# Altium PCB PCB KONACNO.PcbDoc (part 2 of 3)
Units mil, origin at the board's own origin, x right, y up, seen from the top; angles counter-clockwise.
Board outline 9378.94 x 3727.36 mil, 6 copper layers (Top Layer, Signal Layer 1, Signal Layer 2, Signal Layer 3, Signal Layer 4, Bottom Layer), stack 58.8 mil thick; 270 components, 238 nets, 1180 pads, 202 vias.
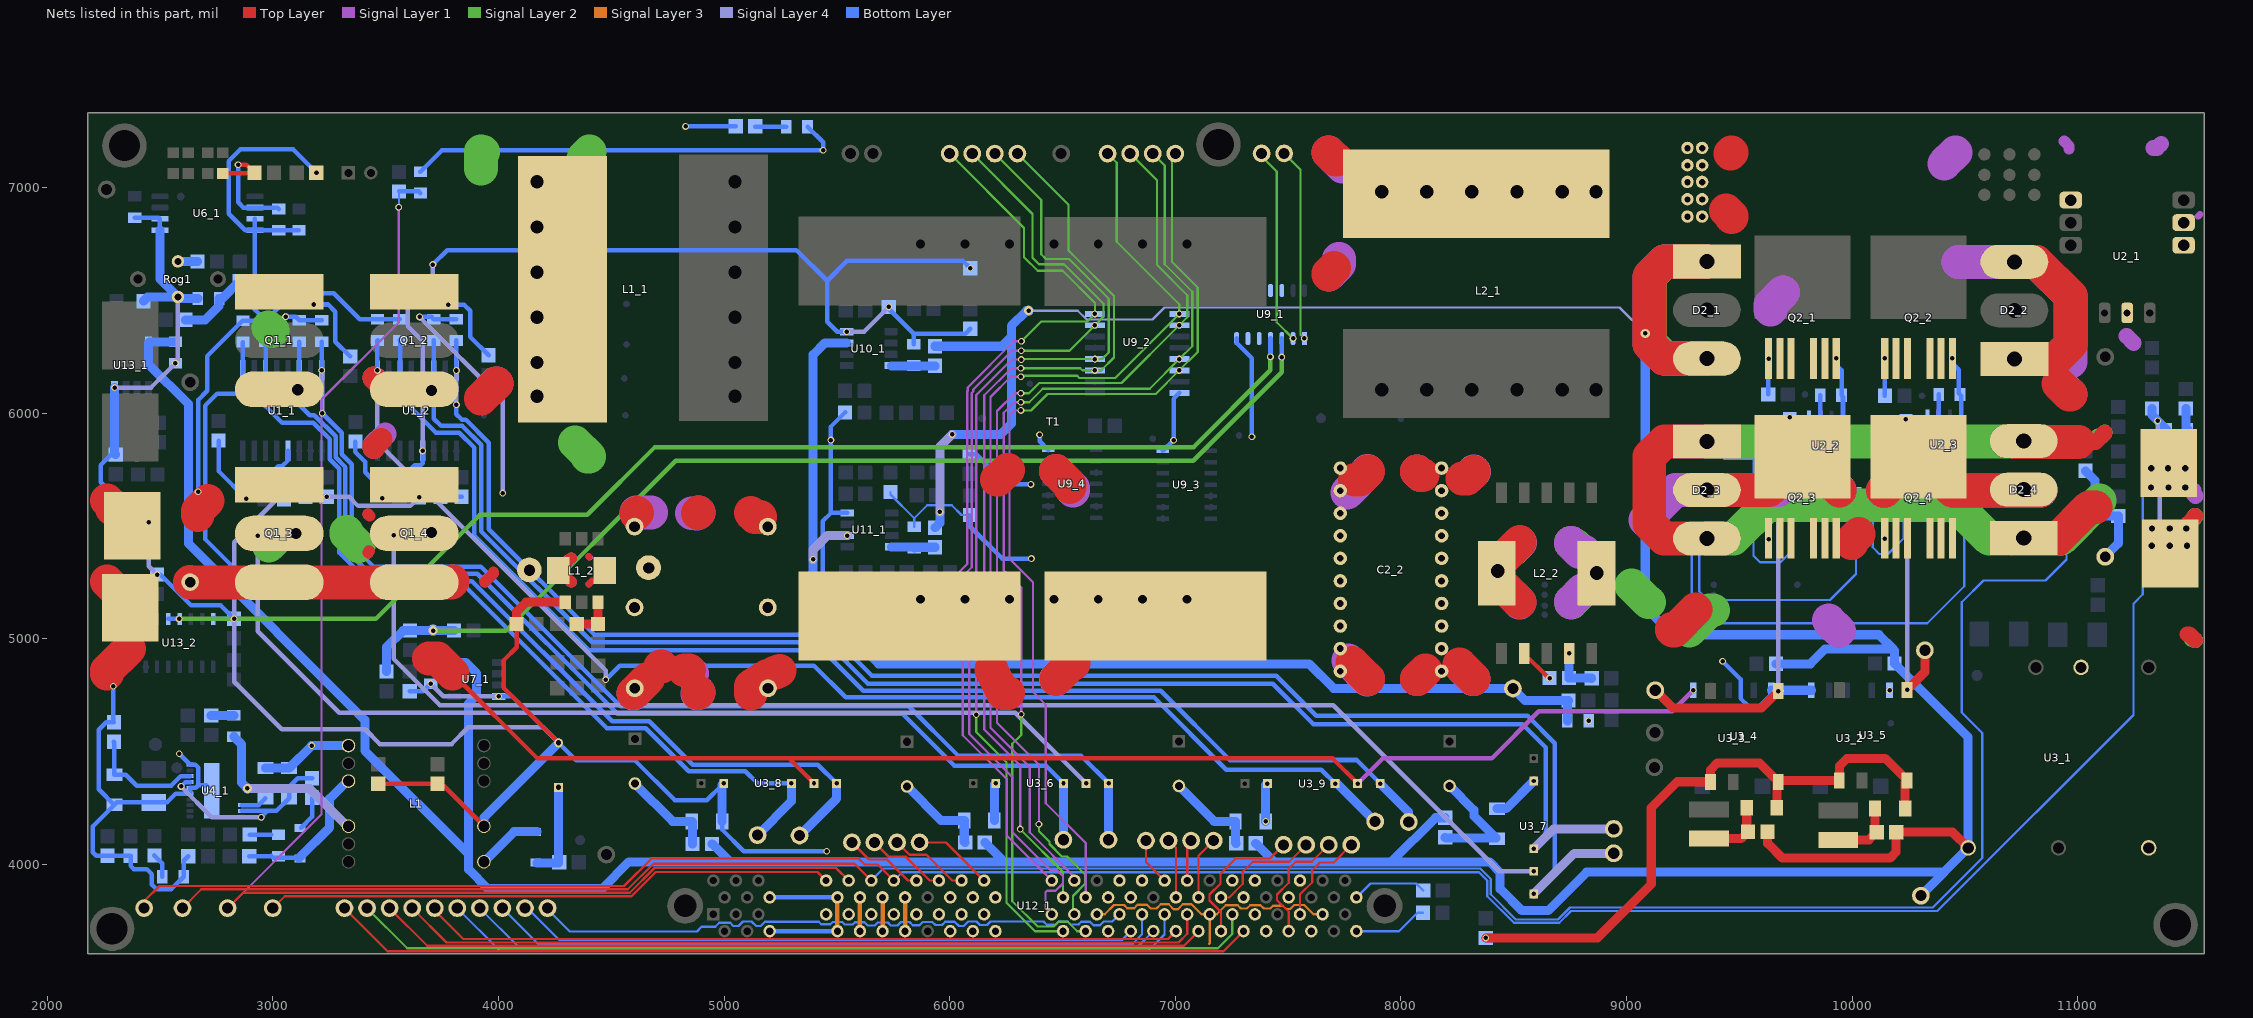
[diagram p6: the nets of this part, all layers, seen from the top]

## Via types
v1: diameter 30, hole 20, Signal Layer 4 to Bottom Layer, 76 vias
v2: diameter 30, hole 20, Top Layer to Bottom Layer, 35 vias
v3: diameter 30, hole 20, Signal Layer 2 to Bottom Layer, 18 vias
v4: diameter 30, hole 20, Signal Layer 1 to Signal Layer 2, 12 vias
v5: diameter 50, hole 28, Top Layer to Bottom Layer, 12 vias
v6: diameter 50, hole 28, Top Layer to Signal Layer 1, 10 vias
v7: diameter 50, hole 28, Top Layer to Signal Layer 2, 9 vias
v8: diameter 40, hole 20, Signal Layer 4 to Bottom Layer, 5 vias
v9: diameter 40, hole 20, Top Layer to Bottom Layer, 5 vias
v10: diameter 30, hole 20, Signal Layer 1 to Bottom Layer, 5 vias
v11: diameter 100, hole 50, Top Layer to Signal Layer 1, 4 vias
v12: diameter 40, hole 20, Signal Layer 2 to Bottom Layer, 3 vias
v13: diameter 40, hole 20, Top Layer to Signal Layer 4, 2 vias
v14: diameter 100, hole 50, Top Layer to Signal Layer 2, 2 vias
v15: diameter 30, hole 20, Signal Layer 3 to Bottom Layer, 1 vias
v16: diameter 120, hole 60, Top Layer to Signal Layer 2, 1 vias
v17: diameter 120, hole 60, Top Layer to Signal Layer 1, 1 vias
v18: diameter 50, hole 28, Signal Layer 1 to Bottom Layer, 1 vias

## Nets (pads, with @x,y where several pads share a name; then routed paths per layer and width w, separated by ;. In a path a pad name is that pad's centre, name@x,y a point inside that pad or via, vN(x,y) a via of type N, cw(c..) or ccw(c..) an arc to the next point about the centre after c; other vN are vias at no path point) (continued)
"+12V NN": C7_1.2 C13_2.2 J44.1 pad.6@5956.69,5562.01 pad.6@6010.83,5905.51 pad.6@6349.41,6453.74 pad.6@9082.68,6353.35 R3_1.2 R3_2.2 R3_3.2 R3_4.2 R3_5.2 R3_6.2 R3_8.1 R3_9.2 R10_12.2 R11_12.2 U3_1.3 U7_1.8 U13_1.8 | length 21363.4
  Top Layer w40: R3_1.2@9625,4144.69 9625,4093.5 9690.94,4027.56 10167.32,4027.56 10194.88,4055.12 R3_2.2@10194.88,4142.72 10444.29,4142.72 U3_1.3@10513.98,4073.03
  Signal Layer 4 w10: v8(6349.41,6453.74) 6567.91,6453.74 6607.28,6414.37 6898.62,6414.37 6951.77,6467.52 8968.5,6467.52 v8(9082.68,6353.35)
  Signal Layer 4 w40: v1(5956.69,5562.01) 5956.69,5851.38 v1(6010.83,5905.51)
  Bottom Layer w40: C13_2.2@2568.9,6315.94 2454.72,6315.94 U13_1.8@2448.82,6310.04 2448.82,6217.52 2626.97,6039.37 2626.97,5421.26 3408.46,4639.76 3408.46,4503.94 3868.11,4044.29 ; C7_1.2@3699.8,4895.67 3803.15,4895.67 U7_1.8@3804.13,4894.69 3855.32,4894.69 3903.54,4846.46 3903.54,4749.02 3868.11,4713.58 3868.11,4044.29 ; R3_5.2@4946.85,4090.55 5026.57,4010.83 ; R11_12.2@5935.04,5492.13 5956.69,5513.78 v1(5956.69,5562.01) ; R10_12.2@5935.04,6296.26 6231.3,6296.26 6273.62,6338.58 ; v1(6010.83,5905.51) 6225.39,5905.51 6273.62,5953.74 6273.62,6338.58 ; R3_3.2@6155.51,4097.44 6242.13,4010.83 ; v8(6349.41,6453.74) 6340.55,6453.74 6273.62,6386.81 6273.62,6338.58 ; R3_6.2@7356.3,4093.5 7431.1,4018.7 7431.1,4010.83 ; R3_4.2@8195.87,4206.69 8153.54,4206.69 7957.68,4010.83 ; v8(9082.68,6353.35) 9082.68,5139.76 9204.72,5017.72 10118.11,5017.72 10181.1,4954.72 ; R3_9.2@9662.4,4888.78 9813.98,4888.78 9879.92,4954.72 10181.1,4954.72 ; J44.1@10304.13,3861.22 10406.5,3963.58 10406.5,3965.55 ; 3868.11,4044.29 3868.11,3978.35 3953.74,3892.72 4460.63,3892.72 4578.74,4010.83 5026.57,4010.83 ; 5026.57,4010.83 6242.13,4010.83 ; 6242.13,4010.83 7431.1,4010.83 ; 7431.1,4010.83 7957.68,4010.83 ; 7957.68,4010.83 8392.72,4010.83 8439.96,3963.58 8439.96,3891.73 8536.42,3795.28 8652.56,3795.28 8822.83,3965.55 10406.5,3965.55 ; 10181.1,4954.72 10187.01,4948.82 R3_8.1@10187.01,4890.75 10513.98,4563.78 U3_1.3@10513.98,4073.03 10406.5,3965.55
"+15V Q21/Q23": C2_3.2 J32.1 pad.6@9722.44,5981.3 pad.12@9672.05,4767.72 U2_2.1 U3_4.5 | length 1950.6
  Top Layer w40: J32.1@9126.97,4771.65 9205.71,4692.91 9597.24,4692.91 v13(9672.05,4767.72)
  Signal Layer 4 w20: v13(9672.05,4767.72) 9672.05,5957.48 9695.87,5981.3 v1(9722.44,5981.3)
  Bottom Layer w20: v1(9722.44,5981.3) 9796.26,5981.3 U2_2.1@9809.06,5968.5
"+15V Q22/Q24": C2_7.2 J33.1 pad.6@10238.19,5973.43 pad.12@10242.91,4773.62 U2_3.1 U3_5.5 | length 1504.3
  Top Layer w40: v13(10242.91,4773.62) 10321.85,4852.56 J33.1@10321.85,4948.82
  Signal Layer 4 w20: v1(10238.19,5973.43) 10242.91,5968.7 v13(10242.91,4773.62)
  Bottom Layer w20: v1(10238.19,5973.43) 10332.76,5973.43 U2_3.1@10332.83,5973.35
"+20V Q11": C1_6.2 J34.1 pad.6@3217.6,6189.55 pad.6@3219.49,5999.02 U1_1.16 U3_6.7 | length 4997.8
  Signal Layer 4 w20: v1(3217.52,6189.63) 3219.49,6187.66 v1(3219.49,5999.02)
  Bottom Layer w20: C1_6.2@3217.52,6316.93 v1(3217.52,6189.63) U1_1.16@3217.6,6189.55 ; v1(3219.49,5999.02) 3306.1,5912.4 3306.1,5816.93 3350.39,5772.64 3350.39,5416.34 3446.85,5319.88 3922.24,5319.88 4541.34,4700.79 5818.9,4700.79 6039.37,4480.31 6583.27,4480.31 U3_6.7@6704.33,4359.25
  Bottom Layer w40: J34.1@6703.74,4109.25 6703.74,4358.66 U3_6.7@6704.33,4359.25
"+20V Q12": C1_11.2 J36.1 pad.6@3813.98,6037.4 pad.6@3813.98,6188.68 U1_2.16 U3_7.7 | length 7159.4
  Signal Layer 4 w20: v1(3813.98,6037.4) pad.6@3813.98,6188.68 v1(3814.06,6188.76)
  Signal Layer 4 w40: U3_7.7@8588.58,3869.49 8768.31,4049.21 J36.1@8942.91,4049.21
  Bottom Layer w20: C1_11.2@3812.99,6321.85 3814.06,6320.79 v1(3814.06,6188.76) ; v1(3813.98,6037.4) 3813.98,5995.08 3837.6,5971.46 3855.32,5971.46 3957.68,5869.09 3957.68,5485.24 4424.21,5018.7 5472.44,5018.7 5655.51,4835.63 7446.85,4835.63 7624.02,4658.46 8561.02,4658.46 8682.09,4537.4 8682.09,3962.99 U3_7.7@8588.58,3869.49
"+20V Q13": C1_8.2 J38.1 U1_1.11 U3_8.7 | length 4077.6
  Bottom Layer w20: C1_8.2@2968.5,6315.94 2968.5,6190.45 U1_1.11@2967.6,6189.55 2967.6,6031.42 3041.34,5957.68 3179.13,5957.68 3251.97,5884.84 3251.97,5795.28 3294.29,5752.95 3294.29,5381.89 3421.26,5254.92 3882.87,5254.92 4503.94,4633.86 4669.29,4633.86 4861.22,4441.93 5415.94,4441.93 U3_8.7@5498.62,4359.25
  Bottom Layer w40: J38.1@5334.65,4127.95 5498.62,4291.93 U3_8.7@5498.62,4359.25
"+20V Q14": C1_13.2 J40.1 U1_2.11 U3_9.7 | length 5754.7
  Bottom Layer w20: C1_13.2@3562.99,6321.85 3564.06,6320.79 U1_2.11@3564.06,6188.76 3564.06,6072.76 3723.43,5913.39 3826.77,5913.39 3892.72,5847.44 3892.72,5457.68 4401.57,4948.82 5437.99,4948.82 5617.13,4769.69 6935.04,4769.69 7242.13,4462.6 7803.74,4462.6 U3_9.7@7908.07,4358.27
  Bottom Layer w40: U3_9.7@7908.07,4358.27 8034.45,4231.89 J40.1@8034.45,4187.99
+ROG: R13_12.1 Rog1.1 | length 87
  Bottom Layer w40: Rog1.1@2579.72,6672.24 2665.35,6672.24 R13_12.1@2666.34,6671.26
"-5V Q11": C1_7.1 J35.1 U1_1.14 U3_6.5 | length 4879.5
  Bottom Layer w20: C1_7.1@3118.11,6316.93 3118.11,6190.06 U1_1.14@3117.6,6189.55 3117.6,6036.93 3163.39,5991.14 3184.06,5991.14 3278.54,5896.65 3278.54,5804.13 3321.85,5760.83 3321.85,5396.65 3430.12,5288.39 3906.5,5288.39 4526.57,4668.31 5789.37,4668.31 6019.69,4437.99 6425.59,4437.99 U3_6.5@6504.33,4359.25
  Bottom Layer w40: J35.1@6503.94,4109.25 6503.94,4358.86 U3_6.5@6504.33,4359.25
"-5V Q12": C1_12.1 J37.1 U1_2.14 U3_7.5 | length 6963.5
  Signal Layer 4 w40: U3_7.5@8588.58,4069.49 8676.57,4157.48 J37.1@8942.91,4157.48
  Bottom Layer w20: C1_12.1@3713.58,6321.85 3714.06,6321.38 U1_2.14@3714.06,6188.76 3714.06,5974.92 3746.06,5942.91 3840.55,5942.91 3924.21,5859.25 3924.21,5475.39 4415.35,4984.25 5454.72,4984.25 5637.8,4801.18 7432.09,4801.18 7611.22,4622.05 8537.4,4622.05 8640.75,4518.7 8640.75,4121.65 U3_7.5@8588.58,4069.49
"-5V Q13": C1_9.1 J39.1 U1_1.9 U3_8.5 | length 4335.7
  Bottom Layer w20: C1_9.1@2868.11,6314.96 2868.11,6190.06 U1_1.9@2867.6,6189.55 2867.6,6107.76 2846.46,6086.61 2753.94,6086.61 2699.8,6032.48 2699.8,5441.93 2918.31,5223.43 3861.22,5223.43 4481.3,4603.35 4653.54,4603.35 4843.5,4413.39 5094.49,4413.39 5148.62,4359.25 U3_8.5@5298.62,4359.25
  Bottom Layer w40: J39.1@5148.62,4129.92 5298.62,4279.92 U3_8.5@5298.62,4359.25
"-5V Q14": C1_14.1 J41.1 pad.6@3463.98,6188.84 pad.6@3464.06,6188.76 pad.6@4475.39,4820.87 U1_2.9 U3_9.5 | length 5644.5
  Signal Layer 4 w20: v1(3463.98,6188.84) 3463.98,5870.67 4475.39,4859.25 v1(4475.39,4818.9)
  Bottom Layer w20: U1_2.9@3464.06,6188.76 3464.06,6321.34 C1_14.1@3464.57,6321.85 ; v1(4475.39,4818.9) 4537.4,4880.91 5398.62,4880.91 5539.37,4740.16 6905.51,4740.16 7226.38,4419.29 7647.05,4419.29 U3_9.5@7708.07,4358.27
  Bottom Layer w40: U3_9.5@7708.07,4358.27 7717.52,4358.27 J41.1@7885.83,4189.96
/FAULT3: U9_1.5
/FAULT4: U9_1.6
/FAULT5: U9_1.12
/FAULT6: U9_1.11
/OVERCURRENT: pad.6@3710.63,5038.39 pad.6@7471.46,6248.03 R7_7.1 R7_8.2 R7_10.1 U9_1.3 | length 4822.8
  Signal Layer 2 w20: v12(3710.63,5036.42) 4033.46,5036.42 4785.43,5788.39 7078.74,5788.39 7471.46,6181.1 v3(7471.46,6248.03)
  Bottom Layer w20: v3(7471.46,6248.03) 7471.85,6248.43 U9_1.3@7471.85,6330.71
  Bottom Layer w40: R7_10.1@3503.94,4854.33 3503.94,4962.6 3577.76,5036.42 R7_8.2@3608.27,5036.42 v12(3710.63,5036.42) R7_7.1@3803.15,5036.42
/VNSHORTCIRCUIT: pad.6@7421.46,6249.02 pad.7@2584.65,5087.6 U9_1.4 U13_2.3 U13_2.4 | length 5484.8
  Signal Layer 2 w20: v3(2584.65,5087.6) 3456.69,5087.6 3918.31,5549.21 4393.7,5549.21 4693.9,5849.41 7081.69,5849.41 7421.46,6189.17 v3(7421.46,6249.02)
  Bottom Layer w20: U13_2.3@2537.01,5087.6 v3(2584.65,5087.6) U13_2.4@2587.01,5087.6 ; U9_1.4@7421.85,6330.71 7421.85,6249.41 pad.6@7422.24,6249.02
ADC-A0: JA0.1 U12_1.57 | length 2534.8
  Top Layer w10: JA0.1@3000,3806.1 3053.15,3859.25 4589.57,3859.25 4696.85,3966.54 5414.4,3966.54 U12_1.57@5452.51,3928.42
ADC-A1: C6_4.2 JA1.1 pad.6@3558.07,6912.4 R6_7.2 U12_1.59 | length 6437.8
  Top Layer w10: JA1.1@2800,3806.1 2867.91,3874.02 4581.69,3874.02 4691.93,3984.25 5496.68,3984.25 U12_1.59@5552.51,3928.42
  Signal Layer 1 w10: JA1.1@2800,3806.1 3216.54,4222.64 3216.54,6060.04 3558.07,6401.57 v10(3558.07,6912.4)
  Bottom Layer w10: v10(3558.07,6912.4) 3560.04,6914.37 R6_7.2@3560.04,6982.28
  Bottom Layer w20: R6_7.2@3560.04,6982.28 3647.64,6982.28 C6_4.2@3654.53,6975.39
ADC-A2: C5_1.2 JA2.1 R5_4.2 U12_1.61 | length 10567.1
  Top Layer w10: JA2.1@2600,3806.1 2683.66,3889.76 4573.82,3889.76 4687.01,4002.95 5577.98,4002.95 U12_1.61@5652.51,3928.42
  Bottom Layer w10: U12_1.61@5652.51,3928.42 5705.39,3981.3 8351.38,3981.3 8397.64,3935.04 8397.64,3867.13 8508.86,3755.91 8695.87,3755.91 8749.02,3809.06 10356.3,3809.06 10575.79,4028.54 10575.79,4582.68 10485.24,4673.23 10485.24,5161.42 10581.69,5257.87 10856.3,5257.87 10949.8,5351.38 10949.8,5569.88 11018.7,5638.78 C5_1.2@11076.77,5638.78
  Bottom Layer w40: R5_4.2@11033.46,5744.09 11076.77,5700.79 C5_1.2@11076.77,5638.78
ADC-A3: C2_11.2 JA3.1 R2_11.2 U12_1.63 | length 11022.9
  Top Layer w10: JA3.1@2429.92,3806.1 2429.92,3836.02 2498.43,3904.53 4557.09,3904.53 4679.13,4026.57 5596.46,4026.57 5623.61,3999.42 5681.51,3999.42 U12_1.63@5752.51,3928.42
  Bottom Layer w10: U12_1.63@5752.51,3928.42 5789.64,3965.55 8345.47,3965.55 8382.87,3928.15 8382.87,3859.25 8500.98,3741.14 8701.77,3741.14 8753.94,3793.31 10376.97,3793.31 11246.06,4662.4 11246.06,5155.51 11287.4,5196.85 11287.4,5838.58 11325.79,5876.97 11437.01,5876.97 C2_11.2@11487.2,5927.17
  Bottom Layer w40: R2_11.2@11478.35,6020.67 11478.35,5936.02 C2_11.2@11487.2,5927.17
ADC-A4: JA4.1 U12_1.65 | length 355.8
  Top Layer w10: JA4.1@5566.73,4097.44 5642.52,4021.65 5722.44,4021.65 5815.67,3928.42 U12_1.65@5852.51,3928.42
ADC-A5: JA5.1 U12_1.67 | length 355.8
  Top Layer w10: JA5.1@5666.73,4097.44 5728.74,4035.43 5804.13,4035.43 5911.15,3928.42 U12_1.67@5952.51,3928.42
ADC-A6: JA6.1 U12_1.69 | length 355.8
  Top Layer w10: JA6.1@5766.73,4097.44 5821.85,4042.32 5897.2,4042.32 6011.1,3928.42 U12_1.69@6052.51,3928.42
ADC-A7: JA7.1 U12_1.71 | length 355.8
  Top Layer w10: JA7.1@5866.73,4097.44 5983.49,4097.44 U12_1.71@6152.51,3928.42
ADC-B0: U12_1.7
ADC-B1: U12_1.9
ADC-B2: U12_1.11
ADC-B3: U12_1.13
ADC-B4: U12_1.15
ADC-B5: U12_1.17
ADC-B6: U12_1.19
ADC-B7: U12_1.21
DRAINQ13: C1_6.1 C1_7.2 L1_1.1 pad.4@4283.46,6549.21 pad.6@3057.09,6427.17 pad.6@3110.24,6103.35 pad.15@3102.36,5467.52 Q1_1.S Q1_3.D U3_6.6 | length 4996.1
  Signal Layer 2 w150: 2980.32,6378.94 2993.11,6366.14 3000,6366.14 ; 2982.28,5413.39 3011.81,5442.91 3011.81,5450.79 ; 3326.77,5472.44 3326.77,5464.57 3379.92,5411.42 ; 3923.23,7082.68 3923.23,7159.45 3931.1,7156.5 ; 4339.57,5870.08 4402.56,5807.09 4395.67,5807.09 ; 4353.35,7055.12 4378.94,7134.84 4403.54,7159.45
  Signal Layer 4 w20: v2(2934.06,5455.71) 2934.06,5033.46 3295.28,4672.24 6291.34,4672.24 U3_6.6@6604.33,4359.25
  Bottom Layer w20: v3(3057.09,6427.17) 3102.36,6427.17 C1_7.2@3118.11,6411.42 C1_6.1@3217.52,6411.42
  other v14: 3103.35,5466.54 3110.24,6103.35
DRAINQ14: C1_11.1 C1_12.2 L1_2.7 pad.6@3650.59,6426.18 pad.6@3703.74,6100.39 pad.15@3702.76,5471.46 pad.15@4136.81,5305.12 Q1_2.S Q1_4.D U3_7.6 | length 8014.1
  Top Layer w50: 3422.24,5380.91 3422.24,5383.86 3427.17,5388.78 ; 3422.24,5551.18 3429.13,5544.29 3431.1,5544.29 ; 3940.94,5250.98 3940.94,5251.97 3978.35,5289.37 3978.35,5294.29 ; 4323.82,5250.98 4272.64,5302.17 L1_2.7@4266.14,5302.17 4321.26,5357.28 4323.82,5357.28
  Top Layer w100: 3447.83,5846.46 3447.83,5852.36 3480.32,5884.84 ; 3447.83,6156.5 3499.02,6105.31 Q1_2.S@3626.97,6105.31 ; Q1_4.D@3488.19,5485.24 3528.54,5485.24 3547.24,5466.54 Q1_4.D@3626.97,5466.54
  Top Layer w150: 3923.23,6063.98 3991.14,6131.89
  Signal Layer 1 w50: 3422.24,5380.91 3422.24,5381.89 3424.21,5383.86 3424.21,5387.8 ; 3422.24,5551.18 3423.23,5550.2 3424.21,5550.2 ; 3940.94,5250.98 3940.94,5254.92 3949.8,5263.78 ; 4309.06,5349.41 4315.94,5349.41 4323.82,5357.28 ; 4318.9,5254.92 4322.83,5250.98 4323.82,5250.98
  Signal Layer 1 w100: 3447.83,5846.46 3447.83,5857.28 3498.03,5907.48 ; 3447.83,6156.5 3452.76,6151.57 3457.68,6151.57
  Signal Layer 1 w150: 3960.63,6102.36 3990.16,6131.89 3992.13,6131.89
  Signal Layer 4 w20: v2(3536.42,5459.65) 3536.42,4910.43 3741.14,4705.71 7699.8,4705.71 8436.02,3969.49 U3_7.6@8588.58,3969.49 ; v1(3650.59,6426.18) 4019.68,6057.09 v2(4019.68,5645.67)
  Bottom Layer w20: v1(3650.59,6426.18) 3703.74,6426.18 C1_12.2@3713.58,6416.34 C1_11.1@3812.99,6416.34
  other v11: 4137.8,5304.13 3703.74,5470.47 3703.74,6100.39
DRAINQ23: C2_4.1 D2_1.A1 D2_1.A2 D2_3.K L2_2.11 pad.13@8867.13,5291.34 Q2_1.2 Q2_1.3 Q2_1.5 Q2_1.6 Q2_1.7 Q2_3.8 U2_2.4 | length 4762.4
  Top Layer w150: D2_3.K@9355.91,5658.94 9632.17,5658.94 Q2_3.8@9779.09,5805.87 9794.53,5805.87 Q2_3.8@9942.91,5657.48 ; D2_1.A2@9355.91,6241.22 9166.26,6241.22 9101.38,6306.1 9101.38,6605.31 9167.2,6671.14 D2_1.A1@9355.91,6671.14
  Signal Layer 1 w150: 8752.95,5424.21 8792.32,5384.84 8813.98,5384.84 ; 8753.94,5161.42 8753.94,5163.39 8805.12,5214.57 ; 9083.66,5526.57 9216.02,5658.94 D2_3.K@9355.91,5658.94 9669.8,5658.94 9670.28,5658.46 ; D2_1.A1@9355.91,6671.14 9169.17,6671.14 9100.39,6602.36 9100.39,6306.1 9165.28,6241.22 D2_1.A2@9355.91,6241.22 D2_1.A2@9427.17,6241.22 ; 9895.67,5081.69 9941.93,5035.43 ; 9910.43,5691.93 9943.9,5658.46
  Signal Layer 2 w150: 8752.95,5162.4 8754.92,5160.43 8754.92,5163.39 8802.17,5210.63 ; 8753.94,5424.21 8767.72,5410.43 8775.59,5410.43 ; 9021.65,5236.22 9096.46,5161.42 9099.41,5161.42 ; D2_1.A2@9355.91,6241.22 9175.12,6241.22 9103.35,6312.99 9103.35,6607.28 9167.2,6671.14 D2_1.A1@9355.91,6671.14
  Bottom Layer w20: v2(9928.15,6242.13) 9928.15,6215.55 9952.76,6190.94 C2_4.1@9952.76,6078.74 9959.06,6072.44 U2_2.4@9959.06,5968.5
  other v16: 8867.13,5291.34
DRAINQ24: C2_8.1 D2_2.A1 D2_2.A2 D2_4.K L2_1.2 pad.4@8332.68,6972.44 pad.6@9269.69,6871.06 pad.6@9269.69,6947.83 pad.6@9269.69,7024.61 pad.6@9269.69,7098.43 pad.6@9269.69,7175.2 pad.6@9334.65,6871.06 pad.6@9334.65,6947.83 pad.6@9334.65,7024.61 pad.6@9334.65,7098.43 pad.6@9334.65,7175.2 Q2_2.2 Q2_2.3 Q2_2.5 Q2_2.6 Q2_2.7 Q2_4.8 U2_3.4 | length 3775.5
  Top Layer w150: 7679.13,6614.17 7679.13,6619.09 7703.74,6643.7 ; 7679.13,7155.51 7710.63,7124.02 7713.58,7124.02 ; 9440.94,6897.64 9464.57,6874.02 9464.57,6868.11 ; 9460.14,7151.08 9464.57,7155.51 ; Q2_4.8@10136.81,5656.5 10144.72,5656.5 Q2_4.8@10294.09,5805.87 10442.95,5657.01 D2_4.K@10833.66,5657.01 ; D2_2.A1@10718.9,6240.28 10902.68,6240.28 10969.49,6307.09 10969.49,6517.72 10817.01,6670.2 D2_2.A2@10718.9,6670.2 ; 10914.37,6129.92 10961.61,6082.68 10968.5,6082.68
  Signal Layer 1 w150: 7679.13,7155.51 7741.14,7093.5 ; 7680.12,6614.17 7725.39,6659.45 7725.39,6683.07 ; 9637.8,6458.66 9637.8,6479.33 9693.9,6535.43 ; 10135.79,5657.48 10143.7,5657.48 ; 10407.48,7105.31 10457.68,7155.51 ; 10448.86,5657.48 D2_4.K@10835.63,5657.48 ; 10470.47,6670.2 D2_2.A2@10718.9,6670.2 10815.04,6670.2 10966.54,6518.7 10966.54,6227.36 ; 10919.29,6128.94 10964.57,6083.66 10968.5,6083.66
  Bottom Layer w20: v2(10443.9,6244.09) 10443.9,6220.47 10472.44,6191.93 10472.44,6087.6 C2_8.1@10477.36,6082.68 10482.83,6077.2 U2_3.4@10482.83,5973.35
  other v6: 9269.69,6870.08 9334.65,6870.08 9269.69,6946.85 9334.65,6946.85 9269.69,7023.62 9334.65,7023.62 9269.69,7097.44 9334.65,7097.44 9269.69,7174.21 9334.65,7174.21
"DSP EN": J6.1 pad.6@7571.85,6330.71 U9_1.1 | length 857.3
  Signal Layer 2 w10: J6.1@7482.36,7150.98 7555.12,7078.23 7555.12,6347.44 v3(7571.85,6330.71)
EMU0: R12_3.2 U12_1.100 | length 334.5
  Bottom Layer w10: U12_1.100@7802.51,3853.62 7803.42,3853.62 7865.16,3915.35 8066.93,3915.35 R12_3.2@8098.43,3883.86
EMU1: R12_1.2 U12_1.50 | length 328.7
  Bottom Layer w10: U12_1.50@7802.51,3704.01 7991.41,3704.01 8072.83,3785.43 R12_1.2@8097.44,3785.43
GATEQ11: Q1_1.G R1_1.2 | length 335.6
  Bottom Layer w20: v2(3181.1,6481.3) 3246.06,6481.3 3277.56,6449.8 3277.56,6316.93 R1_1.2@3343.5,6250.98
GATEQ12: Q1_2.G R1_6.2 | length 338.7
  Bottom Layer w20: v2(3778.54,6479.33) 3849.41,6479.33 3875,6453.74 3875,6337.6 R1_6.2@3956.69,6255.91
GATEQ13: Q1_3.G R1_2.2 | length 307.4
  Bottom Layer w20: R1_2.2@2759.84,5877.95 2759.84,5743.11 v2(2881.89,5621.06)
GATEQ14: Q1_4.G R1_7.2 | length 300.3
  Bottom Layer w20: R1_7.2@3366.14,5874.02 3366.14,5827.76 3410.43,5783.46 3410.43,5737.2 3485.24,5662.4 v2(3485.24,5623.03)
GATEQ21: Q2_1.1 R2_1.2 | length 156.5
  Bottom Layer w20: R2_1.2@9627.95,6082.68 v2@9627.95,6239.17
  other v2: 9628.94,6240.16
GATEQ22: Q2_2.1 R2_3.2 | length 167.3
  Bottom Layer w20: R2_3.2@10144.69,6076.77 v2(10144.69,6244.09)
GATEQ23: Q2_3.1 R2_2.2 | length 298.2
  Bottom Layer w20: v2(9628.94,5441.93) R2_2.2@9628.94,5740.16
GATEQ24: Q2_4.1 R2_4.2 | length 303.1
  Bottom Layer w20: v2(10144.69,5443.9) R2_4.2@10144.69,5747.05
GND_HV: C1_1.2 C1_8.1 C1_9.2 C1_13.1 C1_14.2 C4_1.2 C4_2.2 C4_3.1 C4_4.2 C4_6.1 C6_2.1 C6_3.1 L1.6 pad.2@2368.11,5136.81 pad.2@2377.95,5500.98 pad.12@9295.28,4771.65 Q1_3.S Q1_4.S R4_2.1 R4_3.1 R4_4.1 R4_8.1 R6_6.1 RGND.2 U3_3.5 U3_8.6 U3_9.6 U4_1.15 U4_1.16 U4_1.20 U4_1.21 U6_1.3 U6_1.4 | length 13619.8
  Top Layer w20: 3797.24,4845.47 4173.23,4469.49 5288.39,4469.49 ; U3_8.6@5398.62,4359.25 5288.39,4469.49 ; U3_9.6@7808.07,4358.27 7696.85,4469.49 5288.39,4469.49
  Top Layer w150: 2265.75,4846.46 2265.75,4859.25 2362.2,4955.71 ; pad.2@2265.75,5253.94 2318.9,5200.79 pad.2@2322.83,5200.79 ; pad.2@2265.75,5612.2 2286.42,5591.54 pad.2@2286.42,5576.77 ; C1_1.2@2633.86,5250.98 2634.84,5250 Q1_3.S@3028.54,5250 Q1_4.S@3626.97,5250 3792.32,5250 Q1_4.S@3797.24,5254.92 ; 2667.32,5547.24 2667.32,5566.93 2711.61,5611.22 ; 3692.91,4912.4 3730.31,4912.4 3797.24,4845.47
  Signal Layer 1 w20: U3_9.6@7808.07,4358.27 7919.29,4469.49 8402.56,4469.49 8611.22,4678.15 9201.77,4678.15 v10(9295.28,4771.65)
  Bottom Layer w20: v2(2293.31,4789.37) 2293.31,4632.87 R4_4.1@2296.26,4629.92 2261.81,4629.92 2228.94,4597.05 2228.94,4332.68 C4_4.2@2298.23,4263.39 ; v2@2583.66,4490.16 v2(2585.67,4490.16) U4_1.20@2634.02,4441.81 2657.6,4441.81 2670.28,4429.13 2670.28,4351.38 ; R4_8.1@2625.98,4036.42 2605.31,4015.75 C4_3.1@2605.31,3945.87 2550.2,3890.75 2484.25,3890.75 2464.57,3910.43 2464.57,3956.69 2441.93,3979.33 2383.86,3979.33 2370.08,3993.11 R4_2.1@2370.08,4038.39 R4_3.1@2267.72,4038.39 2217.52,4038.39 2202.76,4053.15 2202.76,4167.91 C4_4.2@2298.23,4263.39 ; v2(2669.29,5651.57) 2669.29,6058.07 2709.65,6098.43 2709.65,6252.95 2866.14,6409.45 C1_9.2@2868.11,6409.45 2967.52,6409.45 C1_8.1@2968.5,6410.43 ; U4_1.21@2729.49,4326.26 2704.37,4351.38 2670.28,4351.38 ; U6_1.3@2921.26,6860.83 U6_1.4@2921.26,6810.83 ; C6_3.1@3116.14,6810.04 C6_2.1@3026.57,6810.04 3025.79,6810.83 U6_1.4@2921.26,6810.83 ; v2(3193.9,7064.96) 3090.55,7168.31 2856.3,7168.31 2805.12,7117.13 2805.12,6883.86 2878.15,6810.83 U6_1.4@2921.26,6810.83 ; C1_13.1@3562.99,6416.34 C1_14.2@3464.57,6416.34 3384.84,6416.34 3269.68,6531.5 3089.57,6531.5 C1_8.1@2968.5,6410.43 ; v2(4829.72,7270.67) 4830.71,7271.65 RGND.2@5052.17,7271.65 ; C4_4.2@2298.23,4263.39 2309.45,4274.61 C4_6.1@2472.44,4274.61 2531.5,4274.61 2570.75,4313.86 U4_1.15@2634.02,4313.86 U4_1.16@2634.02,4339.45 2658.35,4339.45 2670.28,4351.38 ; U6_1.4@2921.26,6810.83 2921.26,6457.68 C1_8.1@2968.5,6410.43
  Bottom Layer w40: C4_2.2@2967.52,4427.17 C4_1.2@3072.83,4427.17 v2(3172.44,4526.77) L1.6@3329.72,4526.77
GND_LV: C1_5.1 C1_10.1 C2_1.2 C2_3.1 C2_5.1 C2_6.1 C2_7.1 C2_9.1 C2_10.1 C2_11.1 C3_4.2 C3_5.2 C3_6.1 C3_7.1 C3_8.1 C3_9.1 C4_7.2 C5_1.1 C6_1.1 C6_4.1 C7_1.1 C8_1.2 C10_1.1 C11_1.1 C13_1.2 C13_2.1 CGND.1 D2_3.A1 D2_3.A2 D2_4.A1 D2_4.A2 L1.10 L1_2.3 L2_2.4 OC.1 pad.2@11408.46,5377.95 pad.6@2298.82,6113.19 pad.6@2449.8,5516.73 pad.6@2568.9,6221.46 pad.6@3239.17,5628.94 pad.6@3648.62,5626.48 pad.6@3648.62,5626.97 pad.6@3664.06,5832.26 pad.6@3699.8,4803.15 pad.6@3709.65,6658.46 pad.6@4000.98,4746.65 pad.6@5543.31,6360.63 pad.6@5730.31,6470.47 pad.6@6091.54,6641.73 pad.6@11353.35,5965.55 pad.7@2487.2,5284.45 pad.7@2828.74,5088.58 Q2_3.2 Q2_3.3 Q2_3.5 Q2_3.6 Q2_3.7 Q2_4.2 Q2_4.3 Q2_4.5 Q2_4.6 Q2_4.7 R1_3.1 R1_4.1 R1_5.1 R1_8.1 R1_9.1 R1_10.1 R2_5.1 R2_6.1 R2_7.1 R2_8.1 R2_10.1 R5_3.1 R7_6.1 R7_9.1 R8_4.1 R10_3.1 R10_4.1 R10_9.1 R10_11.1 R11_3.1 R11_4.1 R11_9.1 R11_11.1 R12_2.1 R13_5.1 R13_8.1 R13_9.1 R13_10.1 Rog1.2 SC_ROG.1 U1_1.4 U1_2.4 U2_1.8 U2_2.7 U2_3.7 U3_1.2 U3_1.5 U3_2.1 U3_2.5 U3_3.1 U3_4.1 U3_4.4 U3_5.1 U3_5.4 U3_6.2 U3_7.2 U3_8.2 U3_9.2 U6_1.5 U6_1.6 U7_1.4 U9_1.7 U9_2.10 U9_3.7 U9_4.7 U10_1.4 U11_1.4 U12_1.6 U12_1.8 U12_1.10 U12_1.12 U12_1.14 U12_1.27 U12_1.37 U12_1.47 U12_1.56 U12_1.58 U12_1.60 U12_1.62 U12_1.64 U13_1.4 U13_2.7 | length 40431.3
  Top Layer w20: SC_ROG.1@3467.52,4357.28 OC.1@3730.31,4357.28 3748.82,4357.28 L1.10@3936.81,4169.29 ; R7_6.1@4080.71,5065.94 4080.71,4961.61 4024.61,4905.51 4024.61,4780.51 C4_7.2@4266.73,4538.39 ; L2_2.4@8545.47,4934.84 8654.53,4825.79 v2(8658.46,4825.79)
  Top Layer w40: R7_6.1@4080.71,5065.94 4080.71,5120.08 4122.8,5162.17 L1_2.3@4296.26,5162.17 ; v2(8375.98,3674.21) 8871.06,3674.21 9109.25,3912.4 9109.25,4250 9225.39,4366.14 U3_4.1@9372.05,4366.14 9372.05,4419.29 9402.56,4449.8 9588.39,4449.8 U3_4.4@9672.05,4366.14 ; C3_4.2@9666.34,4250.98 9666.34,4360.43 U3_4.4@9672.05,4366.14 ; C3_5.2@10234.65,4247.09 10234.65,4363.78 U3_5.4@10242.91,4372.05 10145.47,4469.49 9977.36,4469.49 9942.91,4435.04 U3_5.1@9942.91,4372.05 9677.95,4372.05 U3_4.4@9672.05,4366.14
  Top Layer w70: 11002.95,5871.97 11078.66,5871.97 11119.09,5912.4 ; 11486.22,5019.69 11493.11,5019.69 11519.68,4993.11 ; pad.2@11488.19,5510.83 11519.68,5542.32 11519.68,5544.29
  Top Layer w150: 9200.79,5044.29 9200.79,5039.37 9204.72,5035.43 9211.61,5035.43 9305.12,5128.94 ; D2_3.A2@9355.91,5443.98 9166.26,5443.98 9100.39,5509.84 9100.39,5807.09 9167.2,5873.9 D2_3.A1@9355.91,5873.9 ; 9997.05,5424.21 9997.05,5432.09 10028.54,5463.58 ; D2_4.A1@10718.9,5442.05 10909.57,5442.05 11050.2,5582.68 11077.76,5582.68 ; D2_4.A2@10723.43,5871.97 11002.95,5871.97
  Signal Layer 2 w70: 11089.57,5895.67 11101.38,5895.67 11119.09,5913.39 ; 11495.08,5513.78 11519.68,5538.39 11519.68,5544.29 ; 11505.91,4998.03 11514.76,4998.03 11519.68,4993.11
  Signal Layer 2 w150: 9277.56,5036.42 9367.13,5125.98 9383.86,5125.98 ; D2_3.A2@9355.91,5443.98 9474.49,5443.98 9622.05,5591.54 10458.66,5591.54 10607.17,5443.03 10926.3,5443.03 11096.46,5613.19 ; D2_3.A1@9355.91,5873.9 D2_4.A2@10799.65,5873.9 ; D2_4.A2@10800.59,5872.95 10979.41,5872.95
  Signal Layer 3 w10: U12_1.27@6652.51,3778.82 6687.28,3778.82 6728.35,3819.88 6772.64,3819.88 6786.42,3806.1 6817.91,3806.1 6832.68,3820.87 6874.02,3820.87 6890.75,3804.13 6916.34,3804.13 6935.04,3822.83 6970.47,3822.83 6992.13,3801.18 7011.81,3801.18 7033.46,3822.83 7071.85,3822.83 7115.87,3778.82 U12_1.37@7152.51,3778.82 ; 7150.59,3648.62 7152.51,3650.54 U12_1.37@7152.51,3778.82 ; U12_1.47@7652.51,3778.82 7612.92,3778.82 7571.85,3819.88 7527.56,3819.88 7509.84,3802.17 7491.14,3802.17 7476.38,3816.93 7433.07,3816.93 7420.28,3804.13 7392.72,3804.13 7377.95,3818.9 7331.69,3818.9 7316.93,3804.13 7291.34,3804.13 7276.57,3818.9 7223.43,3818.9 7183.34,3778.82 U12_1.37@7152.51,3778.82
  Signal Layer 3 w20: U12_1.8@5502.51,3704.01 U12_1.58@5502.51,3853.62 ; U12_1.10@5602.51,3704.01 U12_1.60@5602.51,3853.62 ; U12_1.12@5702.51,3704.01 U12_1.62@5702.51,3853.62 ; U12_1.14@5802.51,3704.01 U12_1.64@5802.51,3853.62
  Signal Layer 4 w20: v1(2298.82,6113.19) 2460.63,6113.19 v1(2568.9,6221.46) 2579.72,6232.28 Rog1.2@2579.72,6514.76 ; v1(2449.8,5516.73) 2449.8,5321.85 v1(2487.2,5284.45) ; v1(3648.62,5626.97) 3610.24,5588.58 3377.95,5588.58 3337.6,5628.94 v1(3239.17,5628.94) 3029.53,5628.94 2828.74,5428.15 v1(2828.74,5088.58) 2828.74,4810.04 3040.35,4598.43 3409.45,4598.43 3474.41,4533.46 3792.32,4533.46 3866.14,4607.28 4197.83,4607.28 C4_7.2@4266.73,4538.39 ; v1(3664.06,5832.26) 3664.06,6319.21 3598.43,6384.84 3598.43,6475.39 3622.05,6499.02 3685.04,6499.02 3709.65,6523.62 v1(3709.65,6658.46) ; v1(3699.8,4801.18) 3756.3,4744.69 v1(4000.98,4744.69) ; v1(5543.31,6360.63) 5620.47,6360.63 v1(5730.31,6470.47) ; v5(11328.74,5488.19) 11362.2,5521.65 11362.2,5803.15 11353.35,5812.01 v1(11353.35,5965.55)
  Bottom Layer w10: R11_9.1@5738.19,5650.59 5738.19,5639.76 5843.5,5534.45 ; C11_1.1@5843.5,5496.06 5843.5,5534.45 ; R11_4.1@6089.57,5548.23 6052.17,5548.23 6008.86,5591.54 5900.59,5591.54 5843.5,5534.45 ; D2_3.A2@9355.91,5443.98 D2_3.A2@9321.85,5409.92 ; D2_3.A1@9355.91,5873.9 9432.56,5797.24 9562.01,5797.24 ; C2_3.1@9722.44,5886.81 9722.44,5845.47 ; R2_6.1@9732.28,5556.1 9732.28,5388.78 9682.09,5338.58 9591.54,5338.58 9562.01,5368.11 9562.01,5797.24 ; U2_2.7@9859.06,5742.13 9859.06,5782.68 9844.49,5797.24 ; R2_5.1@10016.73,5550.2 10016.73,5286.42 9901.57,5171.26 9361.22,5171.26 9321.85,5210.63 D2_3.A2@9321.85,5409.92 ; R2_8.1@10228.35,5560.04 10228.35,5445.87 10158.46,5375.98 10120.08,5375.98 10090.55,5405.51 10090.55,5814.96 ; U2_3.7@10382.83,5746.97 10382.83,5779.57 10362.2,5800.2 10301.18,5800.2 10238.19,5863.19 C2_7.1@10238.19,5878.94 10154.53,5878.94 10090.55,5814.96 ; R2_7.1@10496.06,5546.26 10496.06,5232.28 10332.68,5068.9 9358.27,5068.9 9288.39,5138.78 9288.39,5376.46 D2_3.A2@9321.85,5409.92 ; 9562.01,5797.24 9610.24,5845.47 9722.44,5845.47 ; 9722.44,5845.47 9770.67,5797.24 9844.49,5797.24 ; 9844.49,5797.24 9981.3,5797.24 9999.02,5814.96 10090.55,5814.96
  Bottom Layer w20: R13_8.1@2304.13,5815.94 2283.46,5815.94 2237.2,5769.69 2237.2,5692.91 2325.79,5604.33 2403.54,5604.33 2449.8,5558.07 v1(2449.8,5516.73) ; C6_1.1@2388.78,6866.14 2494.69,6866.14 U6_1.6@2500,6860.83 U6_1.5@2500,6810.83 ; v1(2487.2,5284.45) 2501.97,5284.45 2637.8,5148.62 2768.7,5148.62 v1(2828.74,5088.58) 2737.99,5088.58 U13_2.7@2737.01,5087.6 ; U1_1.4@3067.6,5833.05 3067.6,5790.04 3041.34,5763.78 3024.61,5763.78 2972.44,5711.61 C1_5.1@2963.58,5711.61 3050.2,5625 R1_5.1@3050.2,5618.11 3061.02,5628.94 R1_4.1@3145.67,5628.94 v1(3239.17,5628.94) ; R7_9.1@3607.28,4767.72 3666.34,4767.72 v1(3699.8,4801.18) ; C6_4.1@3654.53,7069.88 3750,7165.35 v2(5438.98,7165.35) 5438.98,7200.79 CGND.1@5370.08,7269.69 ; v1(3664.06,5832.26) 3664.06,5778.23 3655.51,5769.69 3629.92,5769.69 3577.76,5717.52 C1_10.1@3562.99,5717.52 3648.62,5631.89 v1(3648.62,5626.97) 3741.14,5626.97 R1_9.1@3743.11,5628.94 R1_8.1@3836.61,5628.94 ; v1(3709.65,6658.46) 3773.62,6722.44 5320.87,6722.44 5456.69,6586.61 ; v1(4000.98,4744.69) 4060.43,4744.69 C4_7.2@4266.73,4538.39 4344.49,4460.63 4605.31,4460.63 4782.48,4283.46 4922.83,4283.46 4991.14,4351.77 U3_8.2@4998.62,4359.25 ; C3_8.1@4991.14,4190.94 4991.14,4154.53 5087.6,4058.07 v2(5454.72,4058.07) v2@5457.68,4058.07 ; U12_1.6@5202.51,3704.01 U12_1.8@5502.51,3704.01 ; U12_1.56@5202.51,3853.62 U12_1.58@5502.51,3853.62 ; R10_11.1@5536.42,6002.95 5473.82,5940.35 v2(5473.82,5880.51) 5473.82,5557.48 ; R11_11.1@5539.37,5193.9 5437.99,5295.28 5437.99,5521.65 5473.82,5557.48 ; v1(5543.31,6360.63) 5501.57,6360.63 5456.69,6405.51 5456.69,6586.61 ; U11_1.4@5546.26,5557.48 5473.82,5557.48 ; v1(5730.31,6470.47) 5730.31,6462.6 5840.55,6352.36 ; C10_1.1@5840.55,6305.12 5840.55,6352.36 ; R11_3.1@6088.58,5817.91 6118.11,5817.91 6251.97,5684.06 v2(6360.24,5684.06) ; R11_4.1@6089.57,5548.23 6089.57,5499.02 6233.27,5355.31 v2(6362.2,5355.31) ; R10_4.1@6091.54,6374.02 6069.88,6352.36 5840.55,6352.36 ; v15(6091.54,6641.73) 6057.09,6676.18 5546.26,6676.18 5456.69,6586.61 ; v2(6398.62,5904.53) 6398.62,5874.8 U9_4.7@6437.01,5836.42 ; U9_3.7@6944.88,5832.48 v2(6992.13,5879.72) 6992.13,6063.78 U9_2.10@7017.72,6089.37 ; U9_1.7@7271.85,6330.71 7271.85,6310.83 7339.57,6243.11 v2(7339.57,5895.67) ; v2(9425.2,4900.59) 9504.92,4820.87 9504.92,4735.24 9539.37,4700.79 9590.55,4700.79 9641.73,4751.97 U3_3.1@9641.73,4771.65 ; R2_6.1@9732.28,5556.1 9733.27,5557.09 C2_6.1@9733.27,5646.65 ; R2_5.1@10016.73,5550.2 C2_5.1@10016.73,5642.72 ; R2_8.1@10228.35,5560.04 10231.3,5562.99 C2_10.1@10231.3,5650.59 ; R2_7.1@10496.06,5546.26 10497.05,5547.24 C2_9.1@10497.05,5639.76
  Bottom Layer w40: v1(2298.82,6113.19) 2298.82,5821.26 R13_8.1@2304.13,5815.94 ; R13_5.1@2427.17,6496.06 2445.87,6514.76 Rog1.2@2579.72,6514.76 ; U6_1.5@2500,6810.83 2500,6594.49 Rog1.2@2579.72,6514.76 ; C13_1.2@2668.31,6507.87 2586.61,6507.87 Rog1.2@2579.72,6514.76 ; L1.10@3936.81,4169.29 3936.81,4208.46 C4_7.2@4266.73,4538.39 ; C3_8.1@4991.14,4190.94 U3_8.2@4991.14,4351.77 ; C3_6.1@6198.43,4194.25 6198.43,4353.35 U3_6.2@6204.33,4359.25 ; v2(7400.63,4190.59) 7400.63,4350.83 U3_9.2@7408.07,4358.27 ; C3_7.1@8425.2,4246.65 8465.75,4246.65 U3_7.2@8588.58,4369.49 ; U3_3.1@9641.73,4771.65 U3_2.5@9818.9,4771.65 ; C5_1.1@11076.77,5544.29 R5_3.1@11179.13,5544.29 11179.13,5423.23 C2_1.2@11120.08,5364.17 ; R2_10.1@11328.74,6020.67 11328.74,5991.14 C2_11.1@11392.72,5927.17
  other v2: 8831.69,4635.83 10165.35,4771.65
  other v5: 11327.76,5411.42 11406.5,5411.42 11483.27,5411.42 11406.5,5488.19 11480.32,5488.19
GPIO-00: JG0.1 pad.6@6643.7,6389.37 U9_2.17 U12_1.23 | length 4390.8
  Signal Layer 1 w10: v4(6316.93,6276.57) 6276.57,6276.57 6104.33,6104.33 6104.33,6095.21 6098.11,6088.99 6098.11,5316.61 6012.8,5231.3 6012.8,5125 6086.61,5051.18 6086.61,4577.76 6278.54,4385.83 6278.54,4142.72 6445.87,3975.39 6473.43,3975.39 6501.97,3946.85 6501.97,3915.35 6469.49,3882.87 6431.1,3882.87 6424.21,3875.98 6424.21,3807.11 U12_1.23@6452.51,3778.82
  Signal Layer 2 w10: JG0.1@6100,7150 6367.13,6882.87 6367.13,6687.99 6395.67,6659.45 6506.89,6659.45 6682.09,6484.25 6682.09,6427.76 v3(6643.7,6389.37) 6530.91,6276.57 v4@6314.96,6276.57
GPIO-01: JG1.1 pad.6@6643.7,6439.37 U9_2.18 U12_1.73 | length 4155.7
  Signal Layer 1 w10: v4(6317.91,6317.91) 6284.45,6317.91 6079.72,6113.19 6079.72,6098.89 6078.11,6097.28 6078.11,5331.06 5989.17,5242.13 5989.17,5109.25 6058.07,5040.35 6058.07,4572.83 6253.94,4376.97 6253.94,4127 U12_1.73@6452.51,3928.42
  Signal Layer 2 w10: JG1.1@6000,7150 6329.72,6820.28 6329.72,6690.94 6389.76,6630.91 6500.98,6630.91 6643.7,6488.19 v3(6643.7,6439.37) 6609.84,6405.51 6405.51,6405.51 v4(6317.91,6317.91)
GPIO-02: JG2.1 pad.6@6643.7,6239.37 U9_2.14 U12_1.24 | length 4424.4
  Signal Layer 1 w10: v4(6118.11,4663.39) 6118.11,6080.71 6274.61,6237.2 v4(6316.93,6237.2)
  Signal Layer 2 w10: v4(6118.11,4663.39) 6118.11,4586.61 6251.97,4452.76 6251.97,3829.72 6377.68,3704.01 U12_1.24@6502.51,3704.01 ; JG2.1@6200,7150 6405.51,6944.49 6405.51,6703.74 6426.67,6682.58 6530.02,6682.58 6704.72,6507.87 6704.72,6268.7 6675.39,6239.37 v3(6643.7,6239.37) 6319.09,6239.37 v4(6316.93,6237.2)
GPIO-03: JG3.1 pad.6@6643.7,6189.37 U9_2.13 U12_1.74 | length 4100.9
  Signal Layer 1 w10: v4@6312.99,4155.51 6312.99,4437.99 6153.54,4597.44 6153.54,6078.74 6273.62,6198.82 v4(6315.94,6198.82)
  Signal Layer 2 w10: JG3.1@6300,7150 6526.57,6923.43 6526.57,6720.47 6542.81,6704.23 6728.35,6518.7 6728.35,6246.06 6671.65,6189.37 6588.19,6189.37 6578.74,6198.82 v4(6315.94,6198.82) ; v4@6314.47,4154.04 6502.51,3965.99 U12_1.74@6502.51,3853.62
  other v3: 6643.7,6189.37
  other v4: 6312.99,4156.5
GPIO-04: JG4.1 pad.6@7017.72,6389.37 U9_2.4 U12_1.25 | length 4275.8
  Signal Layer 1 w10: v4(6315.94,6087.6) 6288.39,6087.6 6209.65,6008.86 6209.65,4627.95 6395.67,4441.93 v4@6395.67,4179.13
  Signal Layer 2 w10: v4(6315.94,6087.6) 6351.38,6087.6 6396.65,6132.87 6761.22,6132.87 v3(7017.72,6389.37) 7053.15,6424.8 7053.15,6522.64 6918.31,6657.48 6918.31,7031.69 JG4.1@6800,7150 ; v4(6395.67,4178.15) 6395.67,4146.65 6441.93,4100.39 6441.93,4090.55 6497.05,4035.43 6519.69,4035.43 6601.38,3953.74 6601.38,3915.35 6546.26,3860.24 6546.26,3785.07 U12_1.25@6552.51,3778.82
GPIO-05: JG5.1 pad.6@7017.72,6439.37 U9_2.3 U12_1.75 | length 4144.9
  Signal Layer 1 w10: v4(6315.94,6161.42) 6270.67,6161.42 6181.1,6071.85 6181.1,4605.31 6354.33,4432.09 6354.33,4142.46 6552.51,3944.28 U12_1.75@6552.51,3928.42
  Signal Layer 2 w10: v4@6321.85,6155.51 v4(6315.94,6161.42) 6319.88,6165.35 6564.96,6165.35 6574.8,6155.51 6733.86,6155.51 v3(7017.72,6439.37) 7017.72,6482.28 6740.16,6759.84 6740.16,7109.84 JG5.1@6700,7150
GPIO-06: JG6.1 pad.6@7017.72,6239.37 U9_2.7 U12_1.26 | length 4494.7
  Signal Layer 1 w10: v4(6315.94,6048.23) 6286.42,6048.23 6240.16,6001.97 6240.16,5303.15 6317.91,5225.39 6316.93,5224.41 v4(6316.93,4665.35)
  Signal Layer 2 w10: v4(6315.94,6048.23) 6352.36,6048.23 6412.4,6108.27 6886.61,6108.27 v3(7017.72,6239.37) 7074.8,6296.46 7074.8,6537.4 6952.76,6659.45 6952.76,7097.24 JG6.1@6900,7150 ; v4(6316.93,4665.35) 6316.93,4573.82 6277.56,4534.45 6277.56,3836.61 6389.76,3724.41 6460.63,3724.41 6482.28,3746.06 6523.62,3746.06 6565.67,3704.01 U12_1.26@6602.51,3704.01
GPIO-07: JG7.1 pad.6@7017.72,6189.37 U9_2.8 U12_1.76 | length 4161.5
  Signal Layer 1 w10: v4(6315.94,6011.81) 6283.46,6011.81 6264.76,5993.11 6264.76,5354.33 6369.09,5250 6369.09,4764.76 6426.18,4707.68 6426.18,4270.67 6602.51,4094.34 U12_1.76@6602.51,3853.62
  Signal Layer 2 w10: v4(6315.94,6011.81) 6360.24,6011.81 6433.07,6084.65 6912.99,6084.65 v3(7017.72,6189.37) 7099.41,6271.06 7099.41,6557.09 6985.24,6671.26 6985.24,7135.24 JG7.1@7000,7150
GPIO-08: U12_1.28
GPIO-09: U12_1.78
GPIO-10: JG10.1 U12_1.29 | length 2771.9
  Bottom Layer w10: JG10.1@4217.87,3806.1 4217.87,3800.83 4315.94,3702.76 4879.92,3702.76 4900.59,3723.43 4960.63,3723.43 4978.35,3741.14 5027.56,3741.14 5041.34,3727.36 5063.98,3727.36 5083.66,3747.05 5122.05,3747.05 5142.72,3726.38 5162.4,3726.38 5182.09,3746.06 5419.29,3746.06 5431.1,3734.25 5470.47,3734.25 5481.3,3745.08 5523.62,3745.08 5535.43,3733.27 5569.88,3733.27 5580.71,3744.09 5622.05,3744.09 5636.81,3729.33 5668.31,3729.33 5681.1,3742.13 5726.38,3742.13 5739.17,3729.33 5768.7,3729.33 5784.45,3745.08 5821.85,3745.08 5836.61,3730.32 5866.14,3730.32 5880.91,3745.08 5923.23,3745.08 5937.01,3731.3 5965.55,3731.3 5980.31,3746.06 6021.65,3746.06 6041.34,3726.38 6062.01,3726.38 6082.68,3747.05 6119.09,3747.05 6134.84,3731.3 6165.35,3731.3 6181.1,3747.05 6415.35,3747.05 6430.12,3732.28 6468.5,3732.28 6482.28,3746.06 6523.62,3746.06 6536.42,3733.27 6570.87,3733.27 6583.66,3746.06 6622.05,3746.06 6637.8,3730.32 6666.34,3730.32 6683.07,3747.05 6706.69,3747.05 6720.74,3747.05 U12_1.29@6752.51,3778.82
GPIO-11: U12_1.79
GPIO-12: JG12.1 U12_1.33 | length 3332.7
  Bottom Layer w10: JG12.1@3817.87,3806.1 4006.85,3617.13 6880.91,3617.13 6952.51,3688.73 U12_1.33@6952.51,3778.82
GPIO-13: JG13.1 U12_1.83 | length 211.1
  Top Layer w10: JG13.1@6870,4105.31 6870,4010.93 U12_1.83@6952.51,3928.42
GPIO-14: JG14.1 U12_1.84 | length 265.2
  Top Layer w10: JG14.1@6970,4105.31 7002.51,4072.8 U12_1.84@7002.51,3853.62
GPIO-15: JG15.1 U12_1.34 | length 3361.7
  Top Layer w10: JG15.1@3717.87,3806.1 3717.87,3795.91 3844.49,3669.29 6967.79,3669.29 U12_1.34@7002.51,3704.01
GPIO-16: JG16.1 U12_1.38 | length 628.9
  Top Layer w10: U12_1.38@7202.51,3704.01 7202.51,3788.63 7151.57,3839.57 7151.57,3866.14 7200.79,3915.35 7200.79,3959.65 7267.72,4026.57 7419.96,4026.57 JG16.1@7480,4086.61
GPIO-17: JG17.1 U12_1.88 | length 505.1
  Top Layer w10: U12_1.88@7202.51,3853.62 7238.46,3853.62 7299.21,3914.37 7299.21,3967.52 7343.5,4011.81 7505.2,4011.81 JG17.1@7580,4086.61
GPIO-18: JG18.1 U12_1.39 | length 4022.1
  Signal Layer 2 w10: JG18.1@3417.87,3806.1 3596.02,3627.95 7188.98,3627.95 7252.51,3691.49 U12_1.39@7252.51,3778.82
GPIO-19: U12_1.89
GPIO-20: JG20.1 U12_1.40 | length 4100.5
  Top Layer w10: JG20.1@3317.87,3806.1 3508.82,3615.16 7213.66,3615.16 U12_1.40@7302.51,3704.01
GPIO-21: U12_1.90
GPIO-22: U12_1.41
GPIO-23: U12_1.91
GPIO-24: JG24.1 U12_1.35 | length 3600.4
  Top Layer w10: JG24.1@3617.87,3806.1 3770.43,3653.54 7013.78,3653.54 7052.51,3692.28 U12_1.35@7052.51,3778.82
GPIO-25: JG25.1 U12_1.85 | length 184.1
  Top Layer w10: U12_1.85@7052.51,3928.42 7052.51,4087.83 JG25.1@7070,4105.31
GPIO-26: JG26.1 U12_1.36 | length 3680.1
  Top Layer w10: JG26.1@3517.87,3806.1 3684.21,3639.76 7038.26,3639.76 U12_1.36@7102.51,3704.01
GPIO-27: JG27.1 U12_1.86 | length 279.7
  Top Layer w10: U12_1.86@7102.51,3853.62 7102.51,4037.83 JG27.1@7170,4105.31
GPIO-30: JG30.1 U12_1.44 | length 541
  Top Layer w10: U12_1.44@7502.51,3704.01 7502.51,3789.81 7450.79,3841.54 7450.79,3866.14 7502.95,3918.31 7502.95,3981.3 7533.46,4011.81 7605.2,4011.81 JG30.1@7680,4086.61
GPIO-31: U12_1.94
GPIO-32: JG32.1 U12_1.45 | length 438.1
  Top Layer w10: U12_1.45@7552.51,3778.82 7552.51,3867.47 7606.3,3921.26 7606.3,3974.41 7640.75,4008.86 7702.24,4008.86 JG32.1@7780,4086.61
GPIO-33: U12_1.95
GPIO-34: U12_1.46
GPIO-48: JG48.1 U12_1.30 | length 2758.9
  Bottom Layer w10: JG48.1@4117.87,3806.1 4128.94,3806.1 4269.69,3665.35 6763.85,3665.35 U12_1.30@6802.51,3704.01
GPIO-49: U12_1.80
GPIO-58: U12_1.18
GPIO-59: U12_1.68
GPIO-60: U12_1.20
GPIO-61: U12_1.70
GPIO-62: U12_1.22
GPIO-63: U12_1.72
GPIO-84: JG84.1 U12_1.31 | length 3005.8
  Bottom Layer w10: JG84.1@4017.87,3806.1 4175.35,3648.62 6811.02,3648.62 6852.51,3690.11 U12_1.31@6852.51,3778.82
GPIO-85: U12_1.81
GPIO-86: JG86.1 U12_1.32 | length 3086.7
  Bottom Layer w10: JG86.1@3917.87,3806.1 4092.09,3631.89 6830.39,3631.89 U12_1.32@6902.51,3704.01
GPIO-87: U12_1.42
"HW EN": J5.1 pad.6@7521.85,6330.71 U9_1.2 | length 883.2
  Signal Layer 2 w10: J5.1@7369.57,7150.86 7449.8,7070.63 7449.8,6402.76 v3(7521.85,6330.71)
INN/100: L2_2.2 R8_3.2 R8_4.2 | length 210
  Bottom Layer w40: v9(8745.47,4934.84) 8745.47,4826.18 R8_4.2@8745.08,4825.79 8844.49,4825.79 R8_3.2@8845.47,4824.8
ITANKNN: C8_1.1 J30.1 pad.6@5394.69,5351.38 pad.6@5546.26,5457.48 R8_2.2 U10_1.3 U11_1.2 | length 5099.1
  Signal Layer 4 w40: v1(5394.69,5351.38) 5394.69,5393.7 5458.46,5457.48 v1(5546.26,5457.48)
  Bottom Layer w40: U10_1.3@5543.31,6310.63 5446.46,6310.63 5394.69,6258.86 v1(5394.69,5351.38) 5394.69,5179.13 5685.04,4888.78 7592.52,4888.78 7701.77,4779.53 J30.1@8496.06,4779.53 8549.21,4726.38 R8_2.2@8743.11,4726.38 8737.2,4720.47 C8_1.1@8737.2,4635.83
IVN/20: L1_2.1 R7_4.2 R7_5.2 | length 190.7
  Top Layer w40: R7_5.2@4347.44,5065.94 R7_4.2@4441.93,5065.94 L1_2.1@4441.93,5162.17
KLEMA_NN+: pad.2@11402.56,5778.54 U2_1.3 U2_1.5 U2_1.6 | length 175.3
  Signal Layer 1 w30: 11532.48,6872.05 11541.34,6880.91 11542.32,6880.91
  Signal Layer 1 w50: 10939.96,7204.72 10960.63,7184.06 10960.63,7170.28
  Signal Layer 1 w70: 11215.55,6341.54 11216.54,6341.54 11248.03,6310.04 ; 11333.66,7175.2 11350.39,7175.2 11369.09,7193.9 ; 11511.81,5657.48 11511.81,5642.72 11521.65,5632.87 11522.64,5633.86
  other v5: 11323.82,5670.28 11401.57,5670.28 11475.39,5670.28 11324.8,5755.91 11399.61,5755.91 11476.38,5755.91
NetC1_2_1: C1_2.1 C1_3.1 C1_4.1 L1_2.8 pad.15@4665.35,5314.96 | length 247.7
  Top Layer w30: 4400.59,5241.14 4413.39,5253.94 4413.39,5256.89 ; 4400.59,5364.17 4402.56,5362.2
  Top Layer w150: C1_4.1@4597.93,4758.37 4662.4,4822.83 ; 4611.22,5555.12 4614.17,5558.07 ; 4718.5,4876.97 4723.43,4876.97 ; 4824.8,4860.24 4844.49,4860.24 ; 4883.86,4758.86 4886.81,4761.81 ; 4883.86,5556.1 4886.81,5559.06
  Signal Layer 1 w30: 4400.59,5241.14 4400.59,5242.13 4401.57,5243.11 ; 4400.59,5364.17 4403.54,5361.22 4404.53,5361.22
  Signal Layer 1 w150: C1_4.1@4598.92,4757.38 C1_4.1@4604.33,4762.8 ; 4611.22,5559.06 4612.2,5559.06 ; 4639.76,5560.04 4676.18,5560.04 ; 4852.36,4846.46 4857.28,4846.46 ; 4858.27,5556.1 4880.91,5554.13 4886.32,5559.55 ; 4881.4,4757.38 4886.81,4762.8
  other v11: 4666.34,5313.98
NetC1_2_2: C1_2.2 C1_3.2 C1_4.2 pad.4@5822.83,5100.39 T1.2 | length 434.2
  Top Layer w150: 5118.11,4757.87 5118.11,4789.48 5166.77,4818.99 5170.26,4821.11 5191.73,4834.13 5227.37,4849.61 5246.62,4857.98 ; 5118.11,5558.07 5136.81,5539.37 5160.43,5539.37 ; 6185.04,4864.17 6236.22,4759.84 6258.86,4759.84 ; 6208.66,5705.71 6214.57,5705.71 6256.4,5747.54 6258.37,5747.54 6258.86,5748.03
NetC2_2_1: C2_2.1 pad.4@6911.42,5100.39 T1.4 | length 849.9
  Top Layer w150: 6471.46,5743.11 6532.48,5682.09 6532.48,5672.24 ; 6472.44,4820.87 6542.32,4890.75 6550.2,4890.75 ; 7784.45,4892.72 7784.45,4890.75 7854.33,4820.87 ; 7796.26,5704.72 7816.93,5704.72 7854.33,5742.13
  Signal Layer 1 w150: 6470.47,5743.11 6546.26,5667.32 6546.26,5657.48 ; 6471.46,4820.87 6471.46,4821.85 6542.32,4892.72 ; 7761.81,5648.62 7852.36,5739.17 7852.36,5743.11 ; 7766.73,4903.54 7850.39,4819.88 7853.35,4822.83
NetC2_2_2: C2_2.2 L2_2.12 pad.13@8429.13,5300.2 | length 841.9
  Top Layer w150: 8071.85,4820.87 8071.85,4822.83 8108.27,4859.25 ; 8071.85,5741.14 8087.6,5725.39 8096.46,5725.39 ; 8258.86,4886.81 8258.86,4884.84 8322.83,4820.87 ; 8272.64,5710.63 8293.31,5710.63 8322.83,5740.16 ; 8526.57,5161.42 8424.21,5263.78 L2_2.12@8424.21,5290.87 8424.21,5325.79 8526.57,5428.15
  Signal Layer 1 w150: 8071.85,4820.87 8072.83,4820.87 8072.83,4822.83 8096.46,4846.46 ; 8071.85,5741.14 8087.6,5725.39 ; 8277.56,4863.19 8318.9,4821.85 8322.83,4821.85 8322.83,4820.87 ; 8282.48,5713.58 8295.28,5713.58 8322.83,5741.14 8323.82,5740.16 ; 8498.03,5397.64 8527.56,5427.17 ; 8502.95,5185.04 8525.59,5162.4 8525.59,5160.43
  other v17: 8429.13,5300.2
NetC2_4_2: C2_4.2 U2_2.2 | length 109.4
  Bottom Layer w20: U2_2.2@9858.27,5969.29 C2_4.2@9858.27,6078.74
NetC2_8_2: C2_8.2 U2_3.2 | length 109.3
  Bottom Layer w20: U2_3.2@10382.83,5973.35 10382.87,5973.39 C2_8.2@10382.87,6082.68
NetC3_4_1: C3_4.1 L3_4.2 R3_1.1 | length 295.6
  Top Layer w40: L3_4.2@9364.17,4114.17 9507.87,4114.17 R3_1.1@9538.39,4144.69 9532.48,4150.59 C3_4.1@9532.48,4250.98
NetC3_5_1: C3_5.1 L3_5.2 R3_2.1 | length 292
  Top Layer w40: L3_5.2@9937.99,4108.27 10073.82,4108.27 R3_2.1@10108.27,4142.72 10100.79,4150.2 C3_5.1@10100.79,4247.09
NetC3_6_2: C3_6.2 L3_6.2 R3_3.1 | length 414.8
  Bottom Layer w40: L3_6.2@5811.02,4345.47 5962.24,4194.25 C3_6.2@6064.57,4194.25 6064.57,4101.77 R3_3.1@6068.9,4097.44
NetC3_7_2: C3_7.2 L3_7.2 R3_4.1 | length 544.4
  Bottom Layer w40: R3_4.1@8195.87,4120.08 8199.8,4116.14 8421.85,4116.14 8322.83,4215.16 8322.83,4240.16 L3_7.2@8215.55,4347.44
NetC3_8_2: C3_8.2 L3_8.2 R3_5.1 | length 422.9
  Bottom Layer w40: L3_8.2@4605.32,4358.27 4772.64,4190.94 C3_8.2@4857.28,4190.94 4860.24,4187.99 R3_5.1@4860.24,4090.55
NetC3_9_2: C3_9.2 L3_9.2 R3_6.1 | length 414.3
  Bottom Layer w40: L3_9.2@7015.75,4347.44 7172.6,4190.59 C3_9.2@7266.77,4190.59 7266.77,4096.42 R3_6.1@7269.69,4093.5
NetC4_1_1: C4_1.1 pad.8 R4_6.1 U4_1.9 U4_1.17 | length 900.6
  Signal Layer 4 w20: v1(2593.5,4345.47) 2730.32,4208.66 v1(2948.82,4208.66)
  Bottom Layer w20: v1(2593.5,4345.47) 2613.07,4365.04 U4_1.17@2634.02,4365.04 ; U4_1.9@2862.36,4237.09 2972.44,4237.09 ; v1(2948.82,4208.66) 2972.44,4232.28 2972.44,4237.09 ; R4_6.1@3174.21,4381.89 3110.24,4381.89 3072.83,4344.49 C4_1.1@3072.83,4293.31 3016.61,4237.09 2972.44,4237.09
NetC4_2_1: C4_2.1 U4_1.8 | length 117.8
  Bottom Layer w20: U4_1.8@2862.36,4262.68 2936.89,4262.68 C4_2.1@2967.52,4293.31
NetC4_3_2: C4_3.2 R4_1.1 | length 108.2
  Bottom Layer w20: R4_1.1@2475.39,4039.37 2510.83,4003.94 C4_3.2@2510.83,3945.87
NetC4_4_1: C4_4.1 R4_4.2 U4_1.18 | length 520.4
  Bottom Layer w20: R4_4.2@2296.26,4543.31 2298.23,4541.34 C4_4.1@2298.23,4397.24 2347.83,4397.24 2396.65,4348.43 2549.21,4348.43 2591.42,4390.63 U4_1.18@2634.02,4390.63
NetC4_5_1: C4_5.1 R4_5.2 | length 95.5
  Bottom Layer w20: R4_5.2@2897.64,4131.89 2993.11,4131.89
NetC4_5_2: C4_5.2 D4_1.2 L1.4 R4_7.2 | length 654.3
  Bottom Layer w20: R4_7.2@2895.67,4036.42 2992.13,4036.42 2993.11,4037.4 3001.97,4028.54 D4_1.2@3117.13,4028.54
  Bottom Layer w40: D4_1.2@3117.13,4028.54 3251.97,4163.39 3251.97,4291.54 L1.4@3329.72,4369.29
NetC4_7_1: C4_7.1 D4_5.1 R4_10.1 | length 430.1
  Bottom Layer w40: D4_5.1@4171.26,4006.89 4266.73,4006.89 C4_7.1@4266.73,4341.54
NetC4_8_1: C4_8.1 L1.3 pad.7@2887.8,4336.61 U4_1.1 U4_1.2 U4_1.3 | length 765.4
  Signal Layer 4 w40: v8(2887.8,4336.61) 3162.4,4336.61 L1.3@3329.72,4169.29
  Bottom Layer w40: C4_8.1@2827.76,4565.94 2862.36,4531.34 U4_1.1@2862.36,4441.81 U4_1.2@2862.36,4416.22 U4_1.3@2862.36,4390.63 2862.36,4362.05 v8(2887.8,4336.61)
NetC4_8_2: C4_8.2 R4_11.1 | length 100.4
  Bottom Layer w40: R4_11.1@2727.36,4660.43 C4_8.2@2827.76,4660.43
NetC6_2_2: C6_2.2 R6_4.1 R6_5.2 U6_1.2 | length 589
  Top Layer w20: R6_4.1@2778.54,7062.01 2916.34,7062.01 R6_5.2@2919.29,7064.96 2882.87,7101.38 2854.33,7101.38 2853.35,7100.39 v2(2846.46,7100.39)
  Bottom Layer w20: v2(2846.46,7100.39) 2846.46,6934.06 2869.68,6910.83 U6_1.2@2921.26,6910.83 3020.28,6910.83 C6_2.2@3026.57,6904.53
NetC10_1_2: C10_1.2 R10_12.1 U10_1.8 | length 193.9
  Bottom Layer w40: U10_1.8@5741.14,6209.65 R10_12.1@5935.04,6209.65
NetC11_1_2: C11_1.2 R11_12.1 U11_1.8 | length 196
  Bottom Layer w40: U11_1.8@5743.11,5407.48 5837.6,5407.48 C11_1.2@5843.5,5401.57 5847.44,5405.51 R11_12.1@5935.04,5405.51
NetC13_1_1: C13_1.1 R13_3.2 R13_4.2 | length 330.5
  Bottom Layer w40: R13_4.2@2613.19,6413.39 2700.79,6413.39 2762.8,6475.39 C13_1.1@2762.8,6507.87 2775.59,6507.87 R13_3.2@2853.35,6585.63
NetCGND_2: CGND.2 RGND.1 | length 136.8
  Bottom Layer w20: RGND.1@5138.78,7269.69 CGND.2@5275.59,7269.69
NetD4_1_1: D4_1.1 R4_6.2 | length 152.9
  Bottom Layer w20: D4_1.1@3125.98,4162.4 3174.21,4210.63 R4_6.2@3174.21,4295.28
NetD4_5_2: D4_5.2 L1.12 | length 289.5
  Bottom Layer w40: L1.12@3936.81,4011.81 4069.68,4144.69 D4_5.2@4171.26,4144.69